# EAGLE board PASSWORD DOOR LOCK SYSTEM (EAGLE 9.7.0)

Size 170.99 x 143.91 mm. Coordinates in mm from the lower left corner, seen from the top.
Outline: 0,0 170.99,0 170.99,143.91 0,143.91 0,0
Copper layers (1*16): Top 0.035mm / dielectric 1.5mm / Bottom 0.035mm
Design rules "default": minimum track width 6mil, minimum drill 0.35mm, track to track 6mil, track to pad 6mil, pad to pad 6mil, via to via 6mil, smd to smd 6mil, copper to edge 40mil, drill to drill 6mil, minimum pad ring 10mil, minimum via ring 8mil, stop-mask expansion 4mil, vias tented up to drill 0mil, thermal gap 10mil

## Footprints (pad centres in the part's own frame; a part is rotated, then mirrored left to right if it is on the bottom)
1X08 = drill 1.016 long: 1 -8.89,0; 2 -6.35,0; 3 -3.81,0; 4 -1.27,0; 5 1.27,0; 6 3.81,0; 7 6.35,0; 8 8.89,0
PIEZO = drill 1 pad 1.6: 1 -3.5,0; 2 3.5,0
RESAD1016W63L850D250B = drill 0.83 pad 1.43: 1 -5.08,0; 2 5.08,0
SG90 = drill 1.016 long: 1 -2.54,0; 2 0,0; 3 2.54,0
TO92 = drill 0.813 octagon: 1 -1.27,0; 2 0,1.905; 3 1.27,0
JHD-162A = drill 1.016 long: 1 -19.05,0; 2 -16.51,0; 3 -13.97,0; 4 -11.43,0; 5 -8.89,0; 6 -6.35,0; 7 -3.81,0; 8 -1.27,0; 9 1.27,0; 10 3.81,0; 11 6.35,0; 12 8.89,0; 13 11.43,0; 14 13.97,0; 15 16.51,0; 16 19.05,0
ARDUINO-UNO-R3-SHIELD = drill 1.016 pad 1.88: 3.3V 24.13,-2.54; 5V 24.13,0; A0 24.13,12.7; A1 24.13,15.24; A2 24.13,17.78; A3 24.13,20.32; A4 24.13,22.86; A5 24.13,25.4; AREF -24.13,-13.97; D2 -24.13,20.32; D3 -24.13,17.78; D4 -24.13,15.24; D5 -24.13,12.7; D6 -24.13,10.16; D7 -24.13,7.62; D8 -24.13,3.81; D9 -24.13,1.27; D10 -24.13,-1.27; D11 -24.13,-3.81; D12 -24.13,-6.35; D13 -24.13,-8.89; GND@0 24.13,2.54; GND@1 24.13,5.08; GND@2 -24.13,-11.43; IOREF 24.13,-7.62; NC 24.13,-10.16; RES 24.13,-5.08; RX -24.13,25.4; SCL -24.13,-19.05; SDA -24.13,-16.51; TX -24.13,22.86; VIN 24.13,7.62

## Placement (x,y rotation side)
KEYPAD1  KEYPAD-4X4  [1X08]  157.66,137.63 0 top
PIEZO1  PIEZO  [PIEZO]  123.16,28.88 180 top
R1  1k  [RESAD1016W63L850D250B]  126.97,36.5 0 top
R2  1k  [RESAD1016W63L850D250B]  38.07,44.12 90 top
R3  1k  [RESAD1016W63L850D250B]  71.09,44.12 90 top
SERVO1  SERVOSG90  [SG90]  7.06,44.4 0 top
T1  NPN  [TO92]  121.89,33.96 0 top
U1  LCD-16X2JHD-162A  [JHD-162A]  52.04,36.63 0 top
U2  ARDUINO-UNO-R3-SHIELD  [ARDUINO-UNO-R3-SHIELD]  133.35,94.12 270 top

## Library data of the parts
KEYPAD1 PIEZO1 R1-R3 SERVO1 U1 U2 = Tinkercad
T1 = Tinkercad; CATEGORY: Transistor; SUB-CATEGORY: BJT; TYPE: NPN

## Nets
T1_B: R1.1 T1.2
U1_LED-: R3.1 U1.16
U1_RW: SERVO1.3 U1.5
U1_VO: R2.1 U1.3
U2_5V: SERVO1.1 U1.2 U2.5V
U2_A0: U1.4 U2.A0
U2_A1: U1.6 U2.A1
U2_A2: U1.11 U2.A2
U2_A3: U1.12 U2.A3
U2_A4: U1.13 U2.A4
U2_A5: U1.14 U2.A5
U2_D2: KEYPAD1.2 U2.D2
U2_D3: KEYPAD1.3 U2.D3
U2_D4: KEYPAD1.4 U2.D4
U2_D5: KEYPAD1.5 U2.D5
U2_D6: KEYPAD1.6 U2.D6
U2_D7: KEYPAD1.7 U2.D7
U2_D8: R1.2 U2.D8
U2_D9: SERVO1.2 U2.D9
U2_GND: R2.2 R3.2 T1.3 U1.1 U2.GND@0 U2.GND@1 U2.GND@2
U2_TX: KEYPAD1.1 U2.TX

## Tracks (layer width: path | path; a pad name or v marks a point on that pad's centre or on a via)
T1_B  (1 unrouted)
U1_LED-  (1 unrouted)
U1_RW  (1 unrouted)
U1_VO  (1 unrouted)
U2_5V  (2 unrouted)
U2_A0  (1 unrouted)
U2_A1  (1 unrouted)
U2_A2  (1 unrouted)
U2_A3  (1 unrouted)
U2_A4  (1 unrouted)
U2_A5  (1 unrouted)
U2_D2  (1 unrouted)
U2_D3  (1 unrouted)
U2_D4  (1 unrouted)
U2_D5  (1 unrouted)
U2_D6  (1 unrouted)
U2_D7  (1 unrouted)
U2_D8  (1 unrouted)
U2_D9  (1 unrouted)
U2_GND  (6 unrouted)
U2_TX  (1 unrouted)